# Altium PCB V3.PcbDoc
Units mm, origin at the board's own origin, x right, y up, seen from the top; angles counter-clockwise.
Board outline 100 x 100 mm, 2 copper layers (Top Layer, Bottom Layer); 48 components, 30 nets, 137 pads, 0 vias.
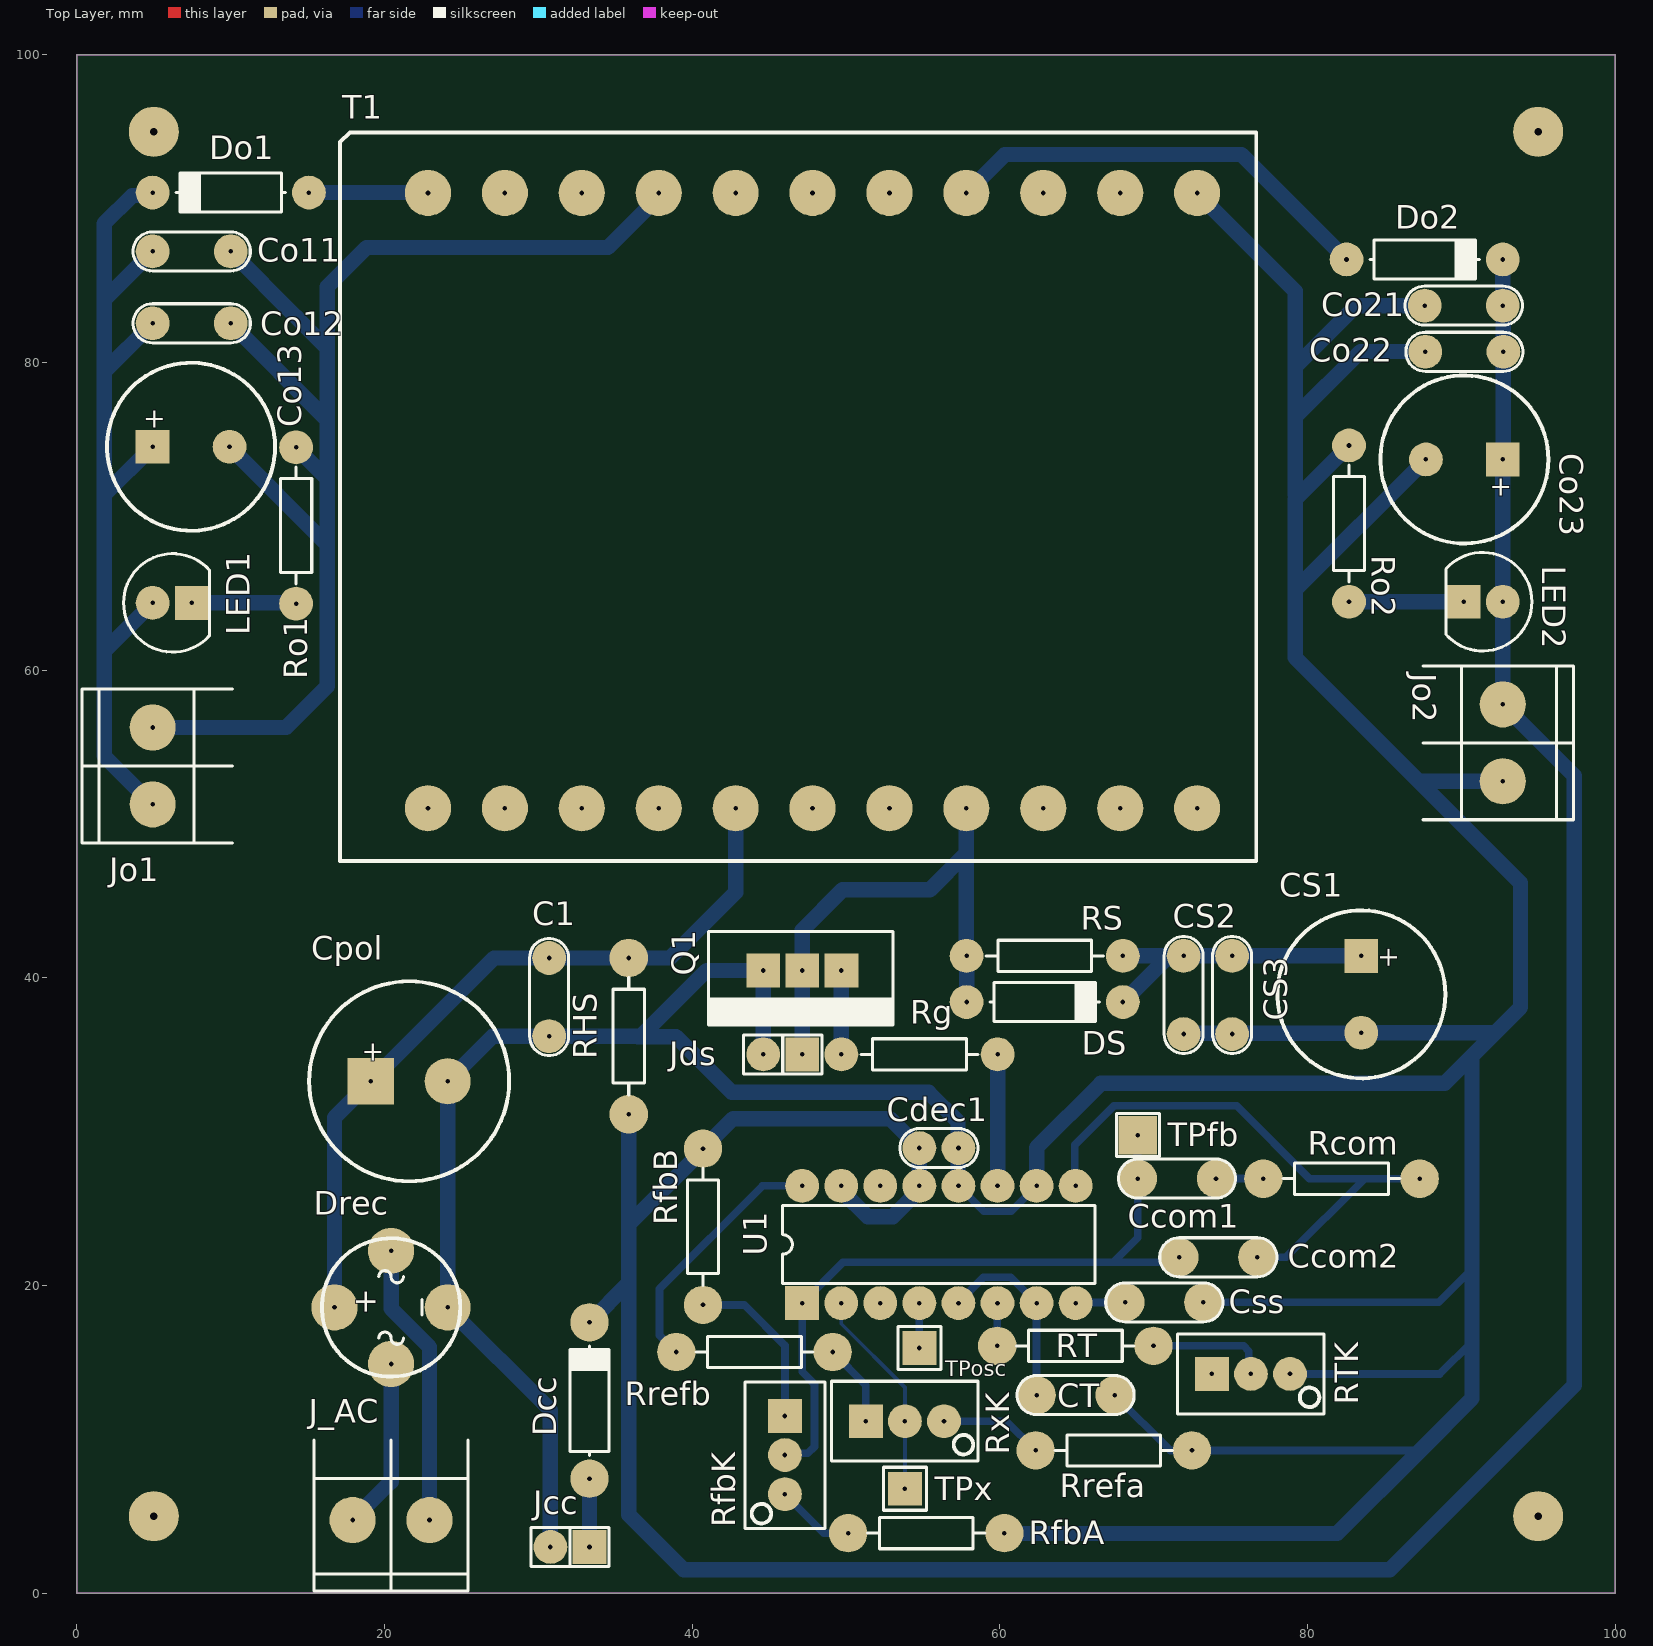
[diagram p0: Top Layer view]
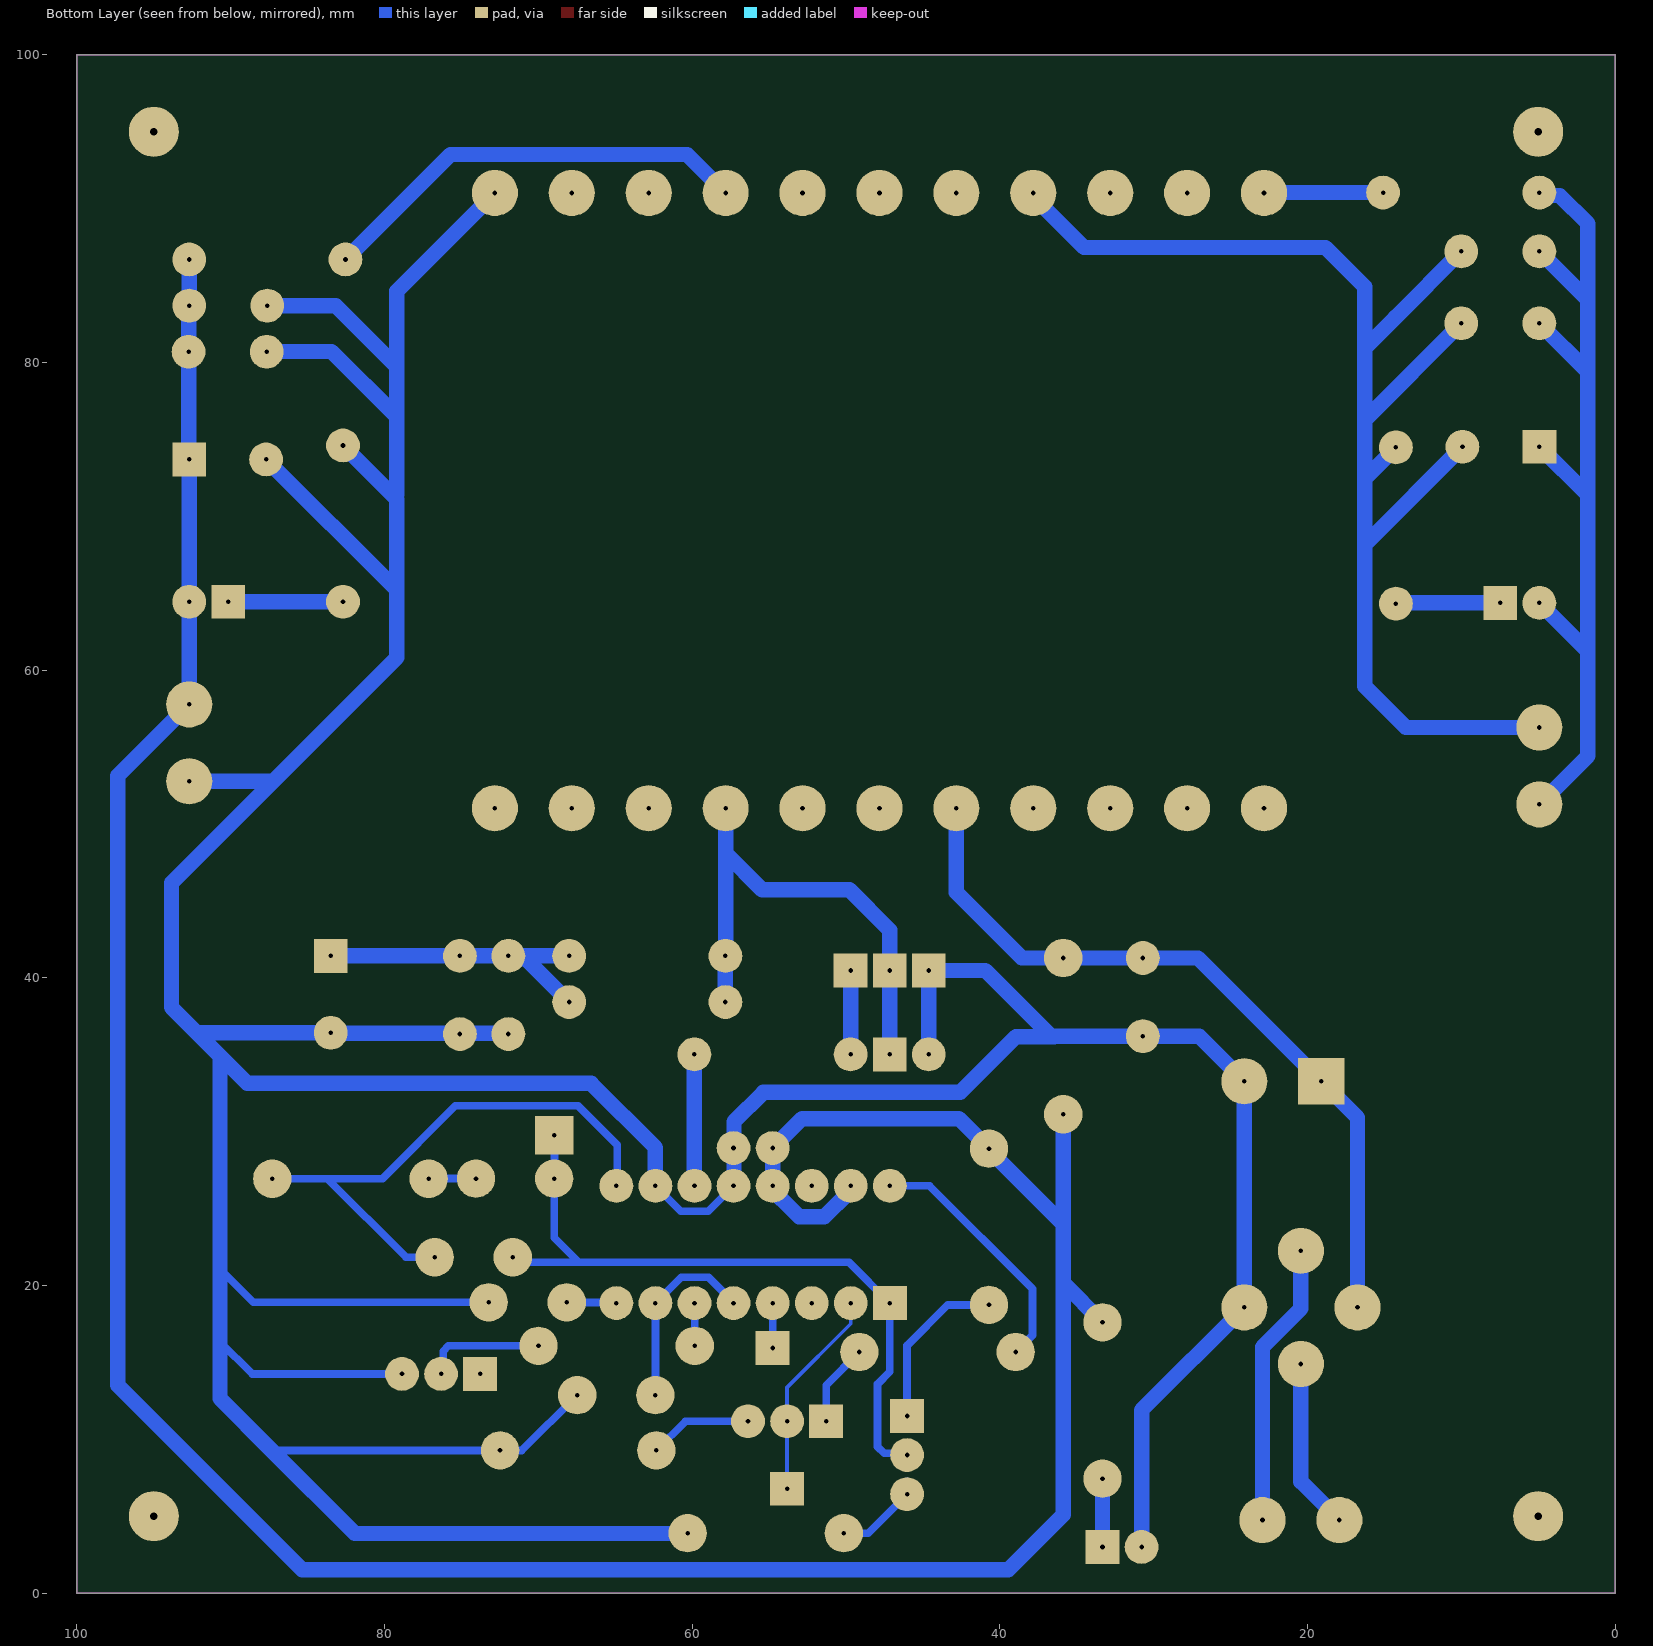
[diagram p1: Bottom Layer view, seen from below]
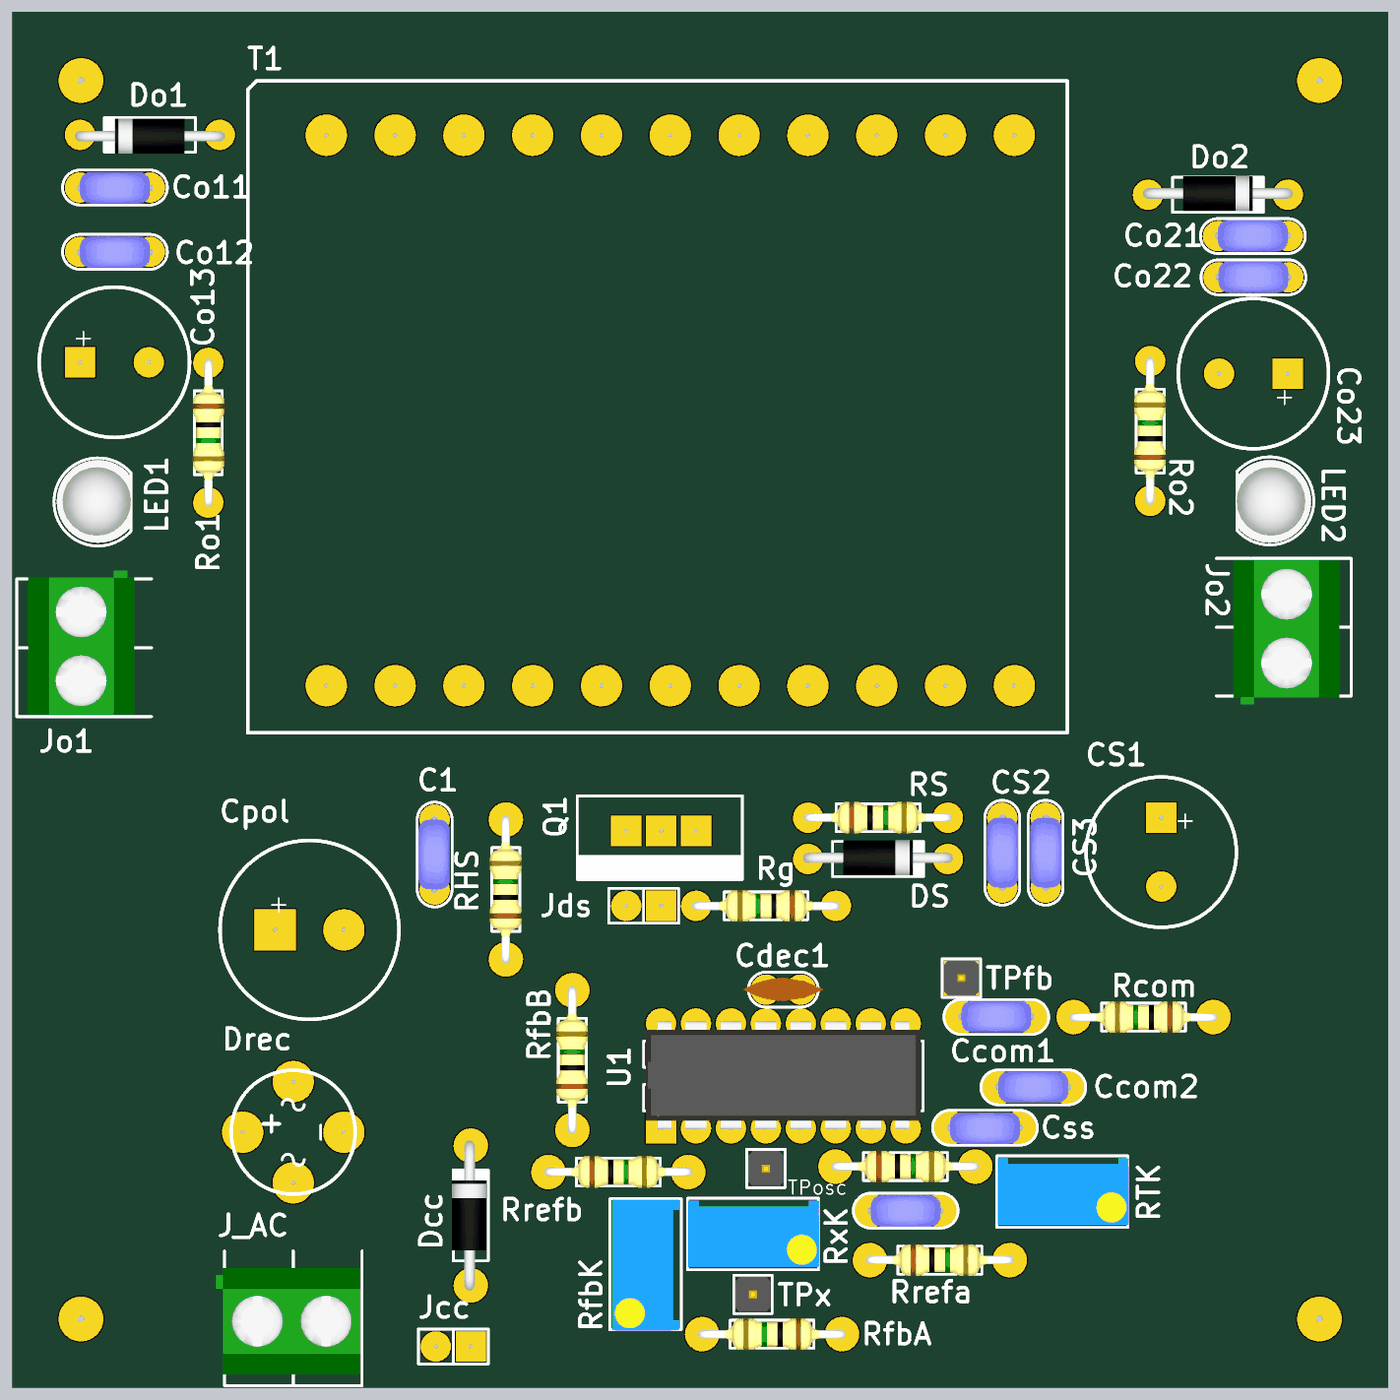
[diagram p2: 3D render of the assembled board from above, using the file's embedded part models]

## Layer stack, top to bottom
Top Solder: solder mask 0.0102, Solder Resist, Dk 3.5
Top Layer: signal copper 0.0356
Dielectric 1: dielectric 0.32, FR-4, Dk 4.8
Bottom Layer: signal copper 0.0356
Bottom Solder: solder mask 0.0102, Solder Resist, Dk 3.5

## Board outline
0,0 0,100 100,100 100,0

## Design rules (kind name [scope] priority, off if disabled: settings)
Clearance [All] p1: gap=0.3 ignorepadtopadclearanceinfootprint=FALSE
PolygonConnect [All] p1: connectstyle=Relief reliefconductorwidth=0.254 reliefentries=4 polygonreliefangle="90 Angle" airgapwidth=0.254
RoutingVias [All] p1: holewidth=0.5 width=2 viastyle="Through Hole" minholewidth=0.3 minwidth=1.5 maxholewidth=0.5 maxwidth=2
SolderMaskExpansion [All] p1: expansion=0.102 istentingtop=FALSE
Width [All] p1: maxlimit=1 minlimit=0.25 preferedwidth=0.5
30 further rules are at their usual default settings.

## Components (designator, comment, footprint, x,y, rotation, side; value= is the part's Value field where it differs from the comment)
C1 "CAP" CAP200#1 30.7,38.75 r270 top
Ccom1 "CAP" CAP200#2 71.515,26.95 r180 top
Ccom2 "CAP" CAP200#2 74.205,21.834 r180 top
Cdec1 "CAP" CAP100 56.04,28.934 r0 top
Co11 "100n" CAP200#1 7.465,87.225 r0 top
Co12 "1u" CAP200#1 7.465,82.55 r0 top
Co13 "47u" CAP200RP 7.425,74.525 r0 top
Co21 "100n" CAP200#1 90.16,83.7 r180 top
Co22 "1u" CAP200#1 90.2,80.7 r180 top
Co23 "47u" CAP200RP 90.2,73.7 r180 top
Cpol "CAPPOL" CAP200RP2 21.602,33.275 r0 top
CS1 "CAPPOL" CAP200RP 83.5,38.926 r270 top
CS2 "" CAP200#1 71.95,38.886 r90 top
CS3 "" CAP200#1 75.1,38.886 r90 top
Css "CAP" CAP200#2 70.695,18.9 r0 top
CT "2n2" CAP200#2 64.93,12.875 r0 top
Dcc "DIODO" DO41#1 33.325,12.52 r90 top
Do1 "DIODO" DO41#2 10.005,91.05 r180 top
Do2 "DIODO" DO41#2 87.62,86.7 r0 top
Drec "" "PUENTE - W10M" 16.748,18.573 r90 top
DS "Snubber" DO41#2 62.92,38.426 r0 top
J_AC "" BORNERA2 20.425,4.75 r90 top
Jcc "CON2" SIP2 32.055,3 r180 top
Jds "CON2" SIP2 45.89,35.025 r180 top
Jo1 "BORNERA 2" BORNERA2 4.925,53.775 r0 top
Jo2 "BORNERA 2" BORNERA2 92.7,55.275 r180 top
LED1 "LED" LED5 6.195,64.375 r0 top
LED2 "LED" LED5 91.43,64.45 r180 top
Q1 "CMP-017-000063-1" "TO-220 V" 47.16,40.475 r180 top
Rcom "RES" RES400#1 87.295,26.941 r180 top
RfbA "1k" RES400#1 60.3,3.9 r180 top
RfbB "1k" RES400#1 40.705,18.734 r90 top
RfbK "1k" "PRESET V" 46.03,8.975 r270 top
Rg "100" RES400#2 59.86,35.025 r180 top
RHS "100k" RES400#1 35.875,31.13 r90 top
Ro1 "RES" RES400#2 14.25,74.485 r270 top
Ro2 "RES" RES400#2 82.7,64.45 r90 top
Rrefa "RES" RES400#1 62.33,9.275 r0 top
Rrefb "RES" RES400#1 38.97,15.675 r0 top
RS "" RES400#2 57.84,41.426 r0 top
RT "3k9" RES400#1 59.83,16.075 r0 top
RTK "1k" "PRESET V" 76.325,14.25 r0 top
RxK "PRESET" "PRESET V" 53.83,11.175 r0 top
T1 "E55/28/21" E55/28/21 22.825,51.025 r90 top
TPfb "TP" TPTH#1 68.975,29.775 r90 top
TPosc "TP" TPTH#2 54.77,15.934 r90 top
TPx "TP" TPTH#2 53.83,6.784 r0 top
U1 "IC_DIP16" DIP16 47.15,18.855 r90 top

## Footprints (in the part's own frame and the unit in brackets; to place one, negate y for a bottom-side part, rotate by r counter-clockwise, add the part's x,y. Pads: shape width x height; smd on the part's side, far side on the other; paste and mask are expansions set on the pad)
BORNERA2 [mm] "Bornera con Tornillos 5mm separación"
  round 3 hole 0.3: 1(0,2.5) 2(0,-2.5)
  silkscreen extent -4.6,-5 5.2,5, body extent -3.76,-4.89 3.94,5.61, height 10
CAP100 [mm]
  round 2.2 hole 0.3: 1(-1.27,0) 2(1.27,0)
  silkscreen extent -2.54,-1.27 2.54,1.27, body extent -2.92,-0.84 2.92,0.86, height 6.12
CAP200#1 [mm]
  round 2.2 hole 0.3: 1(-2.54,0) 2(2.54,0)
  silkscreen extent -3.81,-1.27 3.81,1.27, body extent -2.79,-1.17 2.79,1.12, height 6.24
CAP200#2 [mm]
  round 2.5 hole 0.3: 1(-2.54,0) 2(2.54,0)
  silkscreen extent -3.81,-1.27 3.81,1.27, body extent -2.79,-1.17 2.79,1.12, height 6.24
CAP200RP [mm] "Body Diameter 10.33mm"
  rect 2.2x2.2 hole 0.3: 1(-2.5,0)
  round 2.2 hole 0.3: 2(2.5,0)
  silkscreen extent -5.46,-5.46 5.46,5.46, body extent -5.2,-5.18 5.18,5.21, height 20
CAP200RP2 [mm] "Body Diameter 12.5mm"
  rect 3x3 hole 0.3: 1(-2.5,0)
  round 3 hole 0.3: 2(2.5,0)
  silkscreen extent -6.5,-6.5 6.5,6.5, body extent -6.25,-6.23 6.2,6.25, height 20
DIP16 [mm]
  rect 2.2x2.2 hole 0.3: 1(0,0)
  round 2.2 hole 0.3: 2(0,-2.54) 3(0,-5.08) 4(0,-7.62) 5(0,-10.16) 6(0,-12.7) 7(0,-15.24) 8(0,-17.78) 9(7.62,-17.78) 10(7.62,-15.24) 11(7.62,-12.7) 12(7.62,-10.16) 13(7.62,-7.62) 14(7.62,-5.08) 15(7.62,-2.54) 16(7.62,0)
  silkscreen extent 1.27,-19.05 6.35,1.27, body extent -0.08,-18.89 7.79,1.11, height 1.98
DO41#1 [mm]
  round 2.5 hole 0.3: 1(-5.08,0) 2(5.08,0)
  silkscreen extent -3.56,-1.27 3.56,1.27, body extent -5.46,-1.19 5.46,1.37, height 2.03
DO41#2 [mm]
  round 2.2 hole 0.3: 1(-5.08,0) 2(5.08,0)
  silkscreen extent -3.56,-1.27 3.56,1.27, body extent -5.46,-1.19 5.46,1.37, height 2.03
E55/28/21 [mm] "Transistor Coil E55/28/21"
  round 3 hole 0.3: 1(0,0) 2(0,-5) 3(0,-10) 4(0,-15) 5(0,-20) 6(0,-25) 7(0,-30) 8(0,-35) 9(0,-40) 10(0,-45) 11(0,-50) 12(40,0) 13(40,-5) 14(40,-10) 15(40,-15) 16(40,-20) 17(40,-25) 18(40,-30) 19(40,-35) 20(40,-40) 21(40,-45) 22(40,-50)
  silkscreen extent -3.43,-53.85 43.94,5.71
LED5 [mm]
  round 2.2 hole 0.3: 1(-1.27,0)
  rect 2.2x2.2 hole 0.3: 2(1.27,0)
  silkscreen extent -3.16,-3.2 2.43,3.2, body extent -2.96,-2.97 2.46,3.05, height 12.31
"PRESET V" [mm]
  rect 2.2x2.2 hole 0.3: 1(-2.54,0)
  round 2.2 hole 0.3: 2(0,0) 3(2.54,0)
  silkscreen extent -4.76,-2.6 4.76,2.6, body extent -4.7,-2.42 4.83,2.42, height 11.55
"PUENTE - W10M" [mm]
  round 3 hole 0.3: 1(0,0) 2(-3.677,-3.677) 3(0,-7.354) 4(3.677,-3.677)
  silkscreen extent -4.5,-8.18 4.5,0.82
RES400#1 [mm]
  round 2.5 hole 0.3: 1(0,0) 2(10.16,0)
  silkscreen extent 1.27,-1.02 8.89,1.02, body extent -0.3,-1.14 10.46,1.17, height 2.43
RES400#2 [mm]
  round 2.2 hole 0.3: 1(0,0) 2(10.16,0)
  silkscreen extent 1.27,-1.02 8.89,1.02, body extent -0.3,-1.14 10.46,1.17, height 2.43
SIP2 [mm]
  rect 2.2x2.2 hole 0.3: 1(-1.27,0)
  round 2.2 hole 0.3: 2(1.27,0)
  silkscreen extent -2.54,-1.27 2.54,1.27
"TO-220 V" [mm]
  rect 2.2x2.2 hole 0.3: 1(-2.54,0) 2(0,0) 3(2.54,0)
  silkscreen extent -5.9,-2.54 6.1,3.54, body extent -5,-2 5,3, height 18
TPTH#1 [mm]
  rect 2.5x2.5 hole 0.3: 1(0,0)
  silkscreen extent -1.4,-1.4 1.4,1.4, body extent -1.27,-1.27 1.27,1.27, height 6.04
TPTH#2 [mm]
  rect 2.2x2.2 hole 0.3: 1(0,0)
  silkscreen extent -1.4,-1.4 1.4,1.4, body extent -1.27,-1.27 1.27,1.27, height 6.04

## Part data
C1 Co11 Co21 Co22 CS2 CS3 Css: library part CMP-006-000000-1, Design Item ID=CAP, Source=Schematics.SchLib
Ccom1 Ccom2 Cdec1 CT: library part CMP-024-000000-1, Component Type=Standard, Design Item ID=CAP, Pin Count=2, Source=Schematics.SchLib
Co12: library part CMP-024-000002-1, Component Type=Standard, Design Item ID=CAP, Pin Count=2, Source=Schematics.SchLib
Co13 Co23 Cpol CS1: library part CMP-006-000001-1, Design Item ID=CAPPOL, Source=Schematics.SchLib
Dcc Do1 Do2 DS: library part CMP-008-000001-1, Design Item ID=DIODO, Source=Schematics.SchLib
Drec: library part CMP-008-000003-1, Design Item ID=PUENTE, Source=Schematics.SchLib
J_AC Jo1 Jo2: library part CMP-017-000066-1, Design Item ID="BORNERA 2", Source=Schematics.SchLib
Jcc Jds: library part CMP-017-000004-1, Design Item ID=CON2, Source=Schematics.SchLib
LED1 LED2: library part CMP-026-000002-1, Component Type=Standard, Design Item ID=LED, Pin Count=2, Source=Schematics.SchLib
Rcom RfbA RfbB Rg RHS Ro1 Ro2 RS: library part CMP-013-000000-1, Design Item ID=RES, Source=Schematics.SchLib
RfbK RTK RxK: library part CMP-031-000001-1, Component Type=Standard, Design Item ID=PRESET, Pin Count=3, Source=Schematics.SchLib
Rrefa Rrefb RT: library part CMP-031-000002-1, Component Type=Standard, Design Item ID=RES, Pin Count=2, Source=Schematics.SchLib
T1: "Transistor E55/28/21"
TPfb TPosc TPx: library part CMP-015-000000-1, Design Item ID=TP, Source=Schematics.SchLib
U1: library part CMP-017-000059-1, Design Item ID=IC_DIP16, Source=Schematics.SchLib
Q1: Design Item ID="MOSFET N", Source=Schematics.SchLib

## Free pads (board coordinates)
  round 3.25 hole 0.5: 1(5,5) 2(5,95) 3(95,5) 4(95,95)

## Nets (pads, with @x,y where several pads share a name; then routed paths per layer and width w, separated by ;. In a path a pad name is that pad's centre, name@x,y a point inside that pad or via, vN(x,y) a via of type N, cw(c..) or ccw(c..) an arc to the next point about the centre after c; other vN are vias at no path point)
GND: C1.2 Cdec1.2 Co21.2 Co22.2 Co23.2 Cpol.2 CS1.2 CS2.1 CS3.1 Css.2 CT.2 Drec.3 Jcc.2 Jds.2 Jo2.1 Q1.3 RfbA.1 Ro2.2 Rrefa.2 RTK.3 T1.22 U1.10 U1.12 | length 367
  Bottom Layer w0.5: U1.12 58.96,24.825 60.74,24.825 U1.10 ; CT.2 71.07,9.275 Rrefa.2 87.275,9.275 87.3,9.25 ; Css.2 88.525,18.9 90.7,21.075 ; RTK.3 88.6,14.25 90.7,16.35
  Bottom Layer w1: Drec.3 30.785,11.89 Jcc.2 ; Drec.3@24.102,18.657 Cpol.2 27.037,36.21 C1.2 36.675,36.21 40.94,40.475 Q1.3 Jds.2 Jds.2@44.811,34.834 ; 36.45,36.175 38.95,36.175 42.575,32.55 55.375,32.55 57.28,30.645 57.28,26.505 U1.12 ; RfbA.1 60.325,3.875 81.925,3.875 87.3,9.25 90.7,12.65 90.7,16.35 90.7,21.075 90.7,34.925 ; U1.10 62.39,28.965 66.568,33.143 88.918,33.143 90.7,34.925 ; CS2.1 71.99,36.386 83.46,36.386 CS1.2 92.201,36.426 ; T1.22 79.2,84.65 79.2,79.725 ; 79.2,71.4 79.2,76.475 ; Ro2.2 79.2,71.11 79.2,65.2 ; Co23.2@87.509,73.891 Co23.2 79.2,65.2 ; Co21.2 83.175,83.7 79.2,79.725 ; Co22.2 87.64,80.72 83.445,80.72 79.2,76.475 ; Jo2.1 87.25,52.775 ; 79.2,65.2 79.2,60.825 87.25,52.775 ; 79.2,76.475 79.2,79.725 ; 87.25,52.775 93.85,46.175 93.85,38.075 92.201,36.426 ; 90.7,34.925 92.201,36.426
GNDo1: Co11.2 Co12.2 Co13.2 Jo1.1 Ro1.1 T1.15 | length 92.2
  Bottom Layer w1: Jo1.1 13.6,56.275 16.275,58.95 16.275,68.175 ; Co13.2 16.275,68.175 ; Co12.2 16.275,76.28 ; Co11.2 14.29,82.94 16.275,80.955 ; Ro1.1 16.275,72.46 ; T1.15 37.825,90.775 34.525,87.475 18.825,87.475 16.275,84.925 16.275,80.955 ; 16.275,68.175 16.275,72.46 ; 16.275,72.46 16.275,76.28 ; 16.275,76.28 16.275,80.955
L: Drec.2 J_AC.1 | length 11.2
  Bottom Layer w1: J_AC.1 20.425,7.25 Drec.2
N: Drec.4 J_AC.2 | length 18.5
  Bottom Layer w1: Drec.4 20.425,18.5 22.925,16 J_AC.2
NetCcom1_1: Ccom1.1 Rcom.2 | length 3
  Bottom Layer w0.5: Ccom1.1 Rcom.2@77.015,26.95
NetCS1_1: CS1.1 CS2.2 CS3.2 DS.2 RS.2 | length 20.7
  Bottom Layer w1: DS.2 70.809,41.234 71.759,41.234 CS2.2 ; RS.2 CS2.2 ; CS1.1@83.475,40.9 CS1.1@83.5,40.925 ; CS1.1 CS3.2 CS2.2
NetCss_1: Css.1 U1.8 | length 3.3
  Bottom Layer w0.5: U1.8@64.91,18.875 64.922,18.888 68.142,18.888 Css.1
NetCT_1: CT.1 U1.5 U1.7 | length 12.4
  Bottom Layer w0.5: U1.5 57.31,18.895 58.94,20.525 60.72,20.525 U1.7@62.37,18.875 ; CT.1 U1.7
NetDcc_1: Dcc.1 Jcc.1 | length 4.4
  Bottom Layer w1: Jcc.1 Dcc.1
NetDo1_1: Do1.1 T1.12 | length 7.7
  Bottom Layer w1: Do1.1 T1.12@22.8,91.05
NetDo2_1: Do2.1 T1.19 | length 28.6
  Bottom Layer w1: T1.19 60.325,93.525 75.715,93.525 Do2.1
NetLED1_2: LED1.2 Ro1.2 | length 6.8
  Bottom Layer w1: LED1.2 Ro1.2@14.25,64.375
NetLED2_2: LED2.2 Ro2.1 | length 7.5
  Bottom Layer w1: Ro2.1 LED2.2
NetQ1_1: Q1.1 Rg.2 | length 5.7
  Bottom Layer w1: Rg.2 Q1.1 ; Rg.2@49.875,35.2 Rg.2@50.066,35.391
NetRfbA_2: RfbA.2 RfbK.3 | length 6
  Bottom Layer w0.5: RfbK.3@46.03,7.26 RfbK.3 48.565,3.9 RfbA.2
NetRfbB_1: RfbB.1 RfbK.1 | length 11
  Bottom Layer w0.5: RfbB.1 43.391,18.734 46.03,16.095 RfbK.1
NetRrefa_1: Rrefa.1 RxK.3 | length 6.7
  Bottom Layer w0.5: RxK.3 60.43,11.175 Rrefa.1
NetRrefb_2: Rrefb.2 RxK.1 | length 5.4
  Bottom Layer w0.5: Rrefb.2 51.29,13.515 RxK.1
NetRT_1: RT.1 U1.6 | length 2.8
  Bottom Layer w0.5: RT.1 59.83,18.875 U1.6
NetRT_2: RT.2 RTK.2 | length 7.9
  Bottom Layer w0.5: RT.2 75.85,16.075 76.192,15.733 76.192,14.383 RTK.2
NetTPosc_1: TPosc.1 U1.4 | length 2.9
  Bottom Layer w0.5: TPosc.1 U1.4
Vcom: Ccom2.1 Rcom.1 U1.9 | length 37.1
  Bottom Layer w0.5: U1.9@64.88,26.475 64.88,29.13 67.425,31.675 75.4,31.675 80.134,26.941 83.715,26.941 ; Ccom2.1 78.479,21.834 ; 78.599,21.825 83.715,26.941 ; Rcom.1 83.715,26.941
Vd: C1.1 Cpol.1 Drec.1 RHS.2 T1.5 | length 50
  Bottom Layer w1: Drec.1 16.748,30.921 27.117,41.29 C1.1 38.565,41.29 42.825,45.55 T1.5
Vds: DS.1 Jds.1 Q1.2 RS.1 T1.8 | length 33.6
  Bottom Layer w1: Jds.1 Q1.2 47.16,43.11 49.775,45.725 55.45,45.725 57.807,48.082 ; T1.8 57.807,51.008 T1.8@57.807,50.825 ; DS.1 RS.1 57.807,41.458 57.807,48.082 ; T1.8@58.025,50.825 T1.8@57.807,50.825 ; 57.807,48.082 T1.8@57.807,50.825
Vfb: Ccom1.2 Ccom2.2 RfbK.2 TPfb.1 U1.1 | length 46.5
  Bottom Layer w0.5: RfbK.2 46.153,9.098 47.523,9.098 47.95,9.525 47.95,13.59 47.15,14.39 U1.1 49.804,21.509 67.38,21.509 ; Ccom1.2@68.955,26.97 TPfb.1@68.955,29.784 ; Ccom1.2 68.975,23.104 67.38,21.509 ; Ccom2.2 71.34,21.509 70.639,21.509 67.38,21.509
Vgg: Rg.1 U1.11 | length 8.6
  Bottom Layer w1: U1.11 59.855,26.48 59.855,35.02 Rg.1
VO1: Co11.1 Co12.1 Co13.1 Do1.2 Jo1.2 LED1.1 | length 60.9
  Bottom Layer w1: Jo1.2 1.775,54.425 1.775,61.225 ; LED1.1 1.775,61.225 ; Co13.1 1.775,71.375 ; Co12.1 1.775,79.4 ; Co11.1 1.775,84.075 ; Do1.2 4.734,90.859 3.609,90.859 1.775,89.025 1.775,84.075 ; 1.775,61.225 1.775,71.375 ; 1.775,71.375 1.775,79.4 ; 1.775,79.4 1.775,84.075
VO2: Cdec1.1 Co21.1 Co22.1 Co23.1 Dcc.2 Do2.2 Jo2.2 LED2.1 RfbB.2 RHS.1 U1.13 U1.15 | length 204.6
  Bottom Layer w1: Dcc.2 35.875,20.15 ; RHS.1 35.875,23.975 ; RfbB.2 42.661,30.85 52.854,30.85 Cdec1.1 U1.13 ; RfbB.2@40.825,28.925 35.875,23.975 ; U1.15 49.881,26.284 49.881,25.995 51.402,24.475 53.058,24.475 54.23,25.647 54.23,25.664 U1.13@54.77,26.204 ; Do2.2 Co21.1 92.72,83.68 92.72,80.72 Co22.1@92.73,80.71 ; Co22.1 Co22.1@92.73,80.71 ; 35.875,20.15 35.875,23.975 ; 35.875,20.15 35.875,5.1 39.45,1.525 85.35,1.525 97.35,13.525 97.35,53.125 Jo2.2 LED2.1 Co23.1 92.72,73.72 92.72,80.7 Co22.1@92.73,80.71
Vref: Rrefb.1 U1.16 | length 16.6
  Bottom Layer w0.5: Rrefb.1 37.875,16.77 37.875,19.775 44.575,26.475 U1.16
Vx: RxK.2 TPx.1 U1.2 | length 13.8
  Bottom Layer w0.25: U1.2 49.69,17.515 53.83,13.375 RxK.2 TPx.1
pads on no net: RTK.1 T1.1 T1.2 T1.3 T1.4 T1.6 T1.7 T1.9 T1.10 T1.11 T1.13 T1.14 T1.16 T1.17 T1.18 T1.20 T1.21 U1.3 U1.14

## Keep-outs
Keep-Out Layer:
  the board outline again, w0.1

## Text inside footprints (layer, text, board x,y; h text height)
Co13: Top Overlay "+" at 4.301,75.77 h1.27
Co23: Top Overlay "+" at 93.324,72.455 h1.27 r180
Cpol: Top Overlay "+" at 18.503,34.596 h1.27
CS1: Top Overlay "+" at 84.745,42.05 h1.27 r270
Drec: Top Overlay "+" at 19.425,18.073 h1.52 r90